# Altium PCB EE464_PCB.PcbDoc
Units mm, origin at the board's own origin, x right, y up, seen from the top; angles counter-clockwise.
Board outline 54.9 x 33.3 mm, 2 copper layers (Top Layer, Bottom Layer); 39 components, 23 nets, 98 pads, 36 vias.
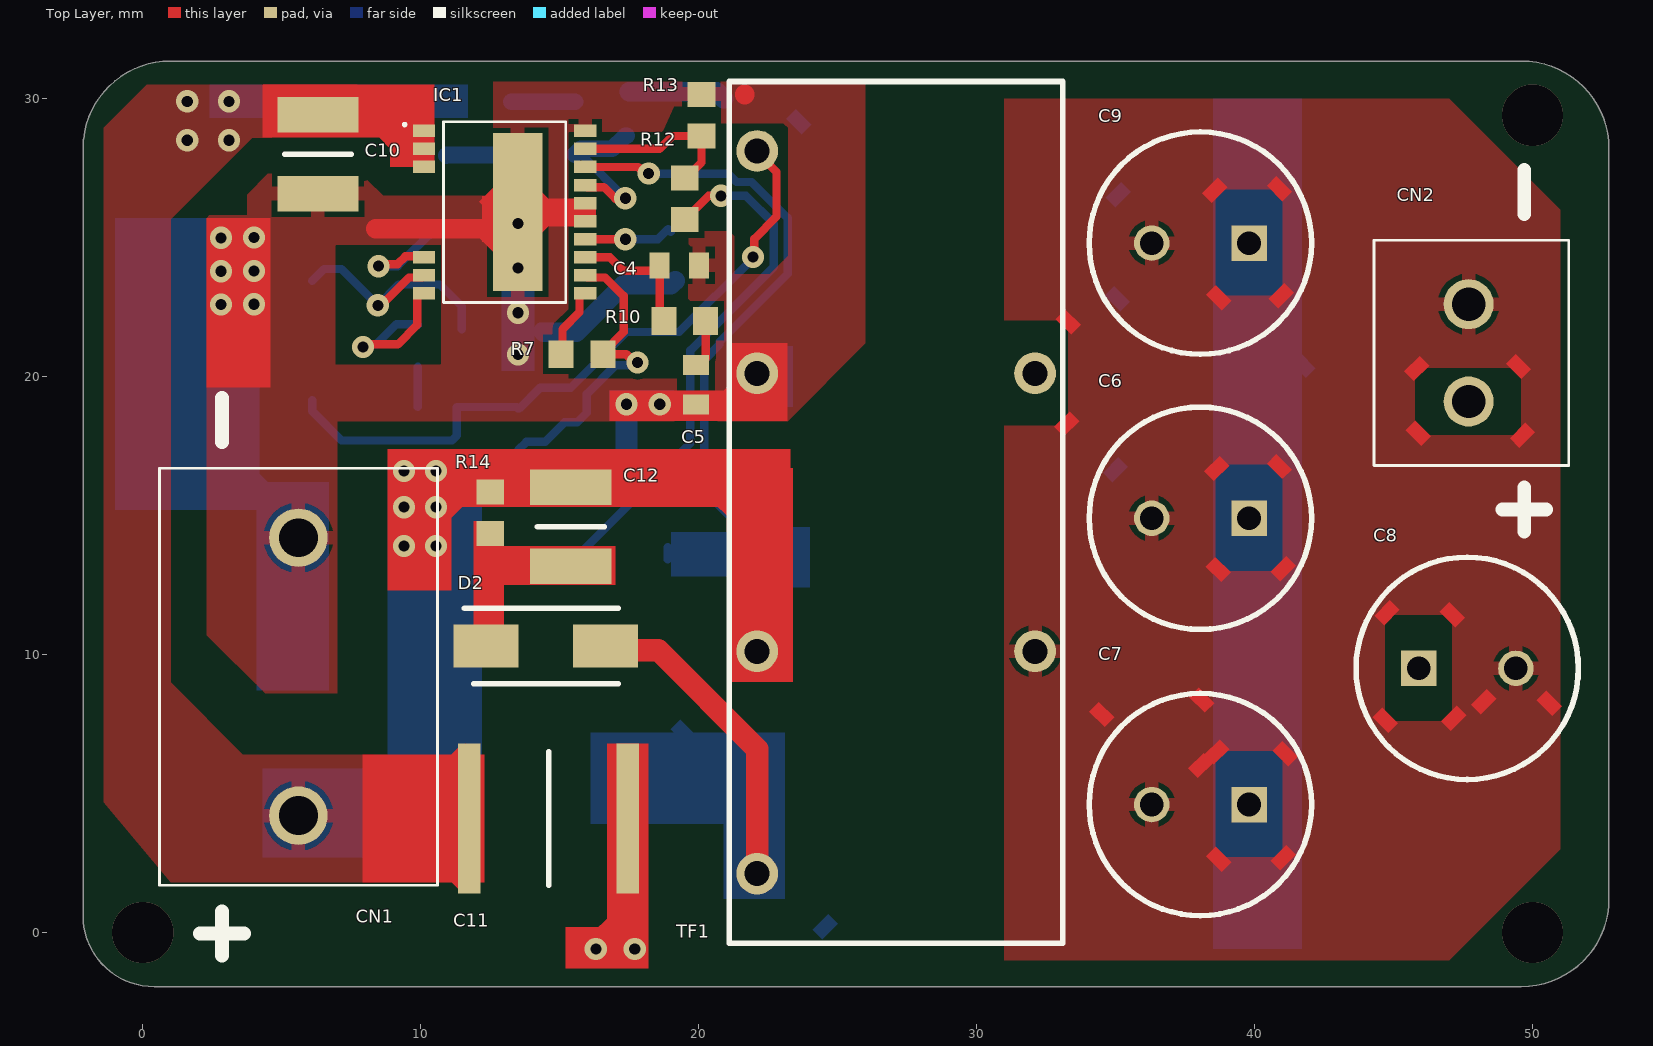
[diagram p0: Top Layer view]
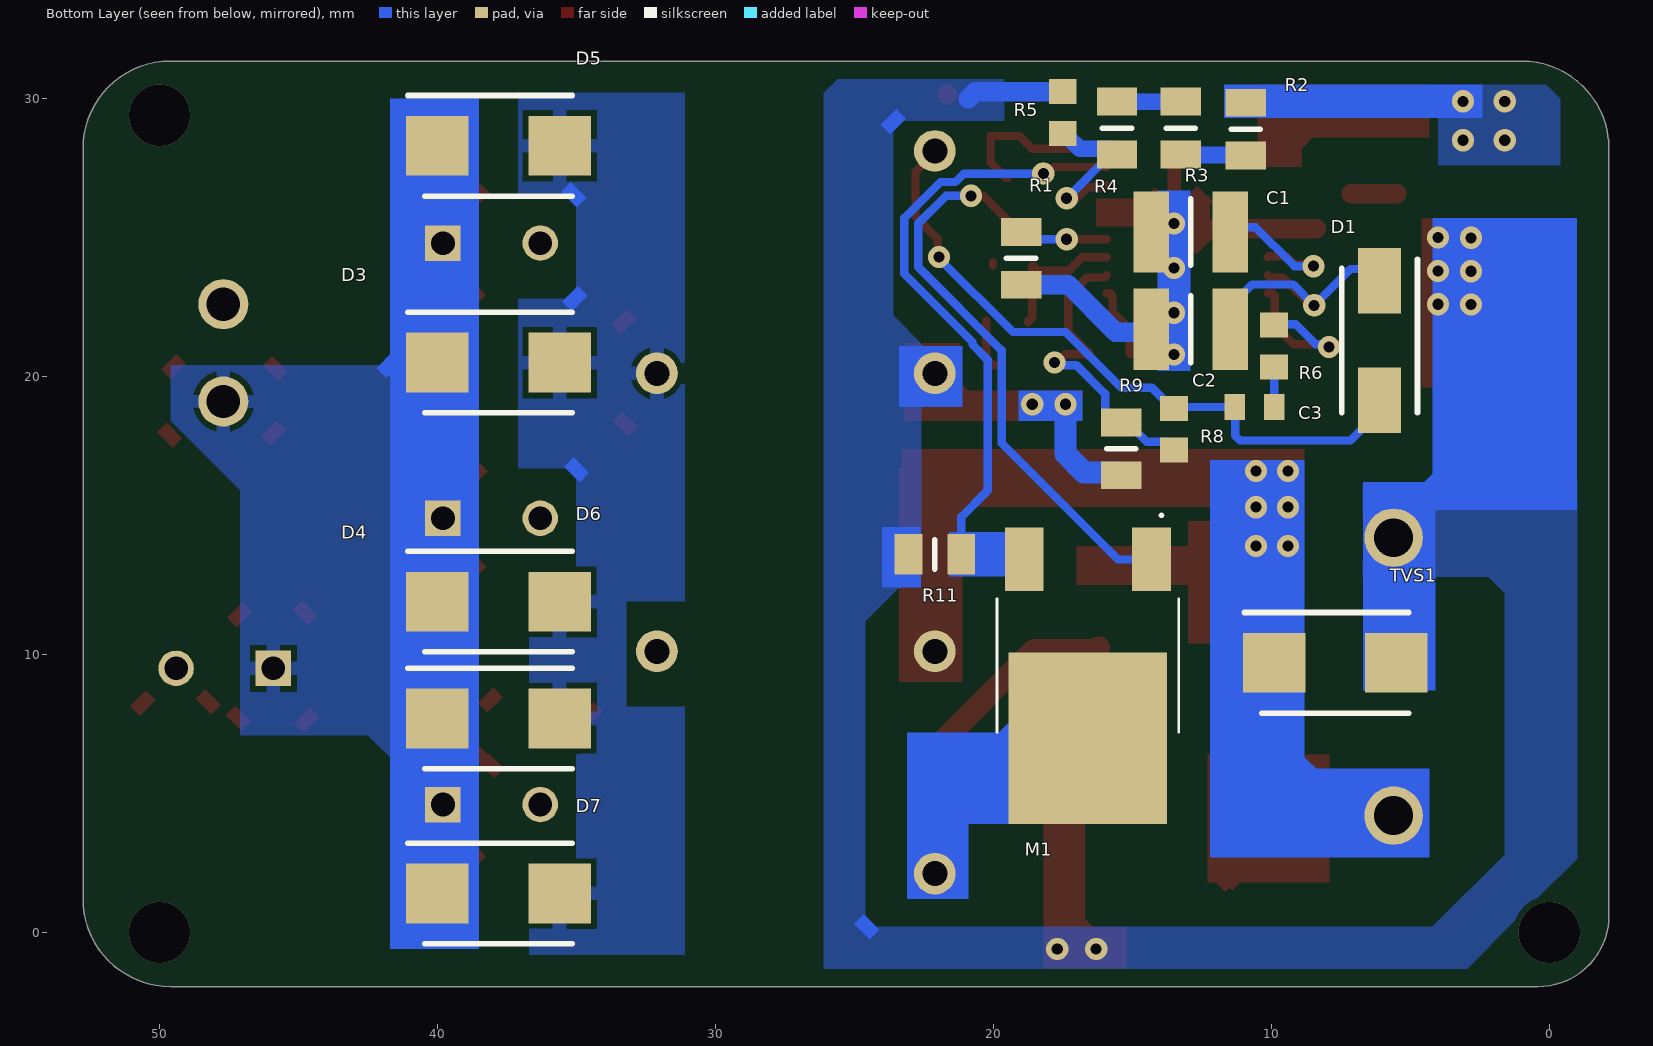
[diagram p1: Bottom Layer view, seen from below]
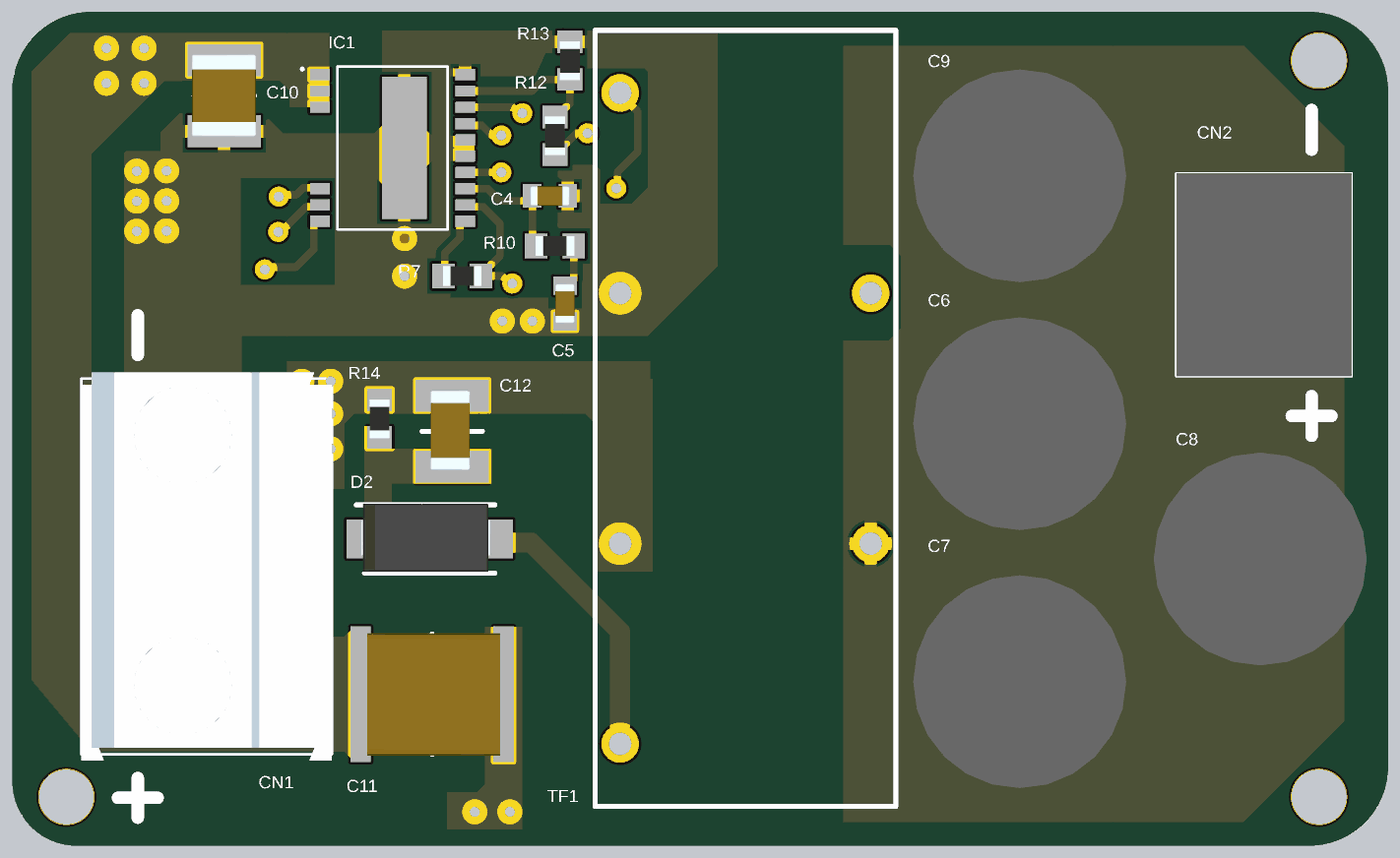
[diagram p2: 3D render of the assembled board from above, using the file's embedded part models]
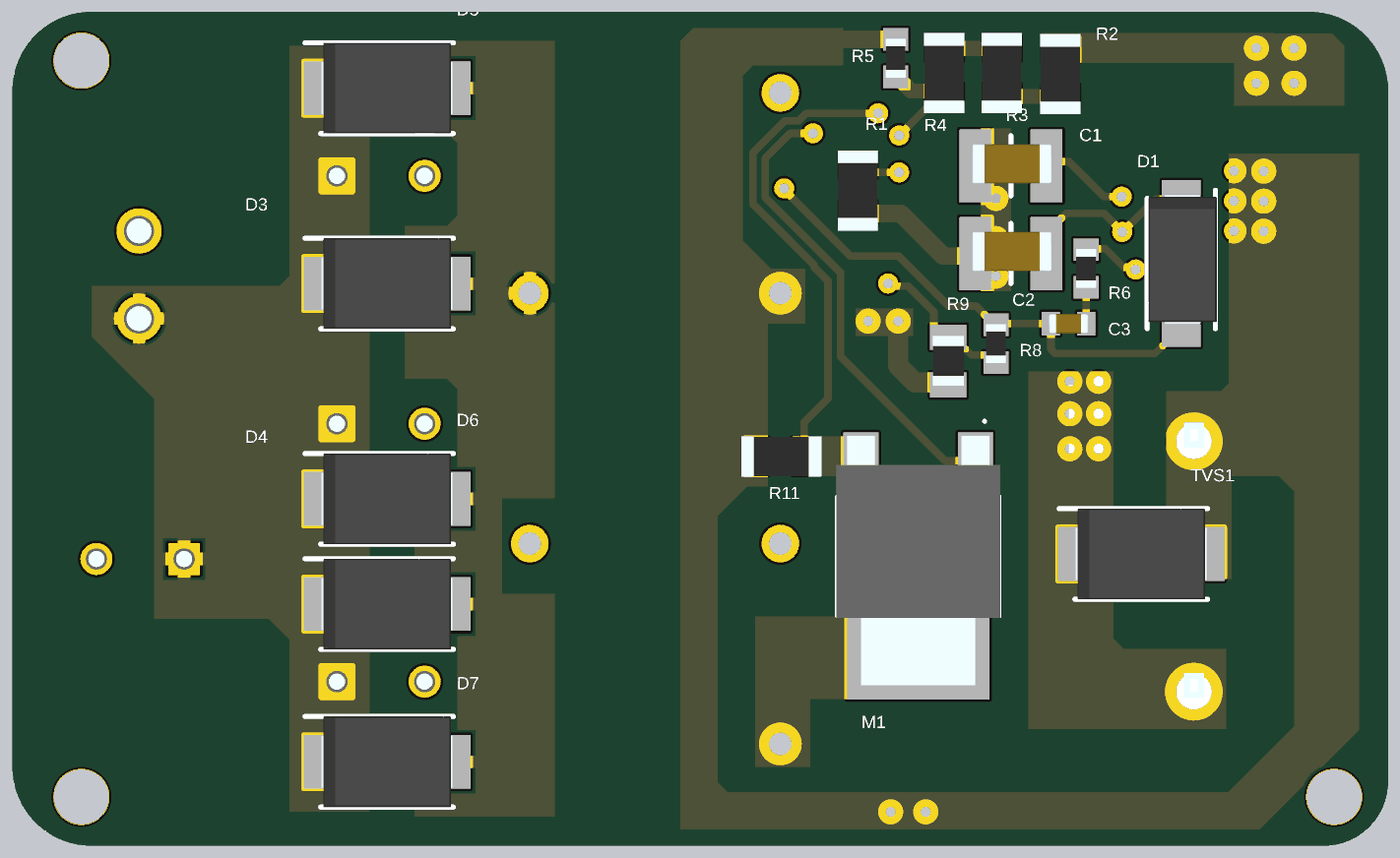
[diagram p3: 3D render of the assembled board from below, using the file's embedded part models]

## Layer stack, top to bottom
Top Solder: solder mask 0.0102, Solder Resist, Dk 3.5
Top Layer: signal copper 0.0356
Dielectric 1: dielectric 0.32, FR-4, Dk 4.8
Bottom Layer: signal copper 0.0356
Bottom Solder: solder mask 0.0102, Solder Resist, Dk 3.5

## Board outline
-2.15,0.61 -2.15,28.473 cw(c-2,28.473) -2.132,28.545 cw(c1,28.205) 1,31.355 cw(c1,31.205) 1.001,31.355 19.6,31.355 49.6,31.355 cw(c49.6,28.205) 52.75,28.205 52.75,1.205 cw(c49.6,1.205) 49.6,-1.946 3.6,-1.946 0.405,-1.946 cw(c0.405,0.61)

## Design rules (kind name [scope] priority, off if disabled: settings)
Clearance [All] p1: gap=0.2 ignorepadtopadclearanceinfootprint=FALSE except(0: Arc-Hole Track-Hole SMDPad-Hole THPad-Hole Via-Hole Fill-Hole Poly-Hole Region-Hole Text-Hole)
HoleToHoleClearance [All] p1: gap=0.4 allowstackedmicrovias=TRUE
MinimumSolderMaskSliver [All] p1: minsoldermaskwidth=0.1
PolygonConnect [All] p1: thpad.connectstyle=Relief thpad.reliefconductorwidth=0.5 thpad.reliefentries=4 thpad.polygonreliefangle="90 Angle" thpad.airgapwidth=0.2 smdpad.connectstyle=Relief smdpad.reliefconductorwidth=0.5 smdpad.reliefentries=4 smdpad.polygonreliefangle="90 Angle" smdpad.airgapwidth=0.2 via.connectstyle=Direct via.reliefconductorwidth=0.254 via.reliefentries=4 via.polygonreliefangle="90 Angle" via.airgapwidth=0.254
RoutingVias [All] p1: holewidth=0.4 width=0.8 viastyle="Through Hole" minholewidth=0.2 minwidth=0.4 maxholewidth=0.8 maxwidth=1.6
SilkToSilkClearance [All] p1: silktosilkclearance=0.1
SilkToSolderMaskClearance [IsPad] p1: minsilkscreentomaskgap=0.1 clearancetoexposedcopper=TRUE
SolderMaskExpansion [All] p1: expansion=0.102 istentingtop=FALSE
Width [All] p1: maxlimit=1.5 minlimit=0.2 preferedwidth=0.5
26 further rules are at their usual default settings.

## Classes and differential pairs
component class EE464_SCH: C1 C2 C3 C4 C5 C6 C7 C9 C10 C11 C12 CN1 CN2 D1 D2 D3 D4 D5 D6 D7 IC1 M1 R1 R2 R3 R4 R5 R6 R7 R8 R9 R10 R11 R12 R13 R14 TVS1

## Components (designator, comment, footprint, x,y, rotation, side; value= is the part's Value field where it differs from the comment)
C1 "CAP 4.7uF 1206" CAP_1206 12.9,25.205 r180 bottom
C2 "CAP 4.7uF 1206" CAP_1206 12.9,21.705 r180 bottom
C3 "CAP 47pF 0603" 0603_CAP 10.6,18.905 r0 bottom
C4 "CAP 47pF 0603" 0603_CAP 19.3,24.005 r180 top
C5 "CAP 100nF" 0603_CAP 19.9,19.705 r90 top
C6 "A750KK337M1CAAE014" CAPPRD350W65D800H900 39.8,14.905 r180 top
C7 "A750KK337M1CAAE014" CAPPRD350W65D800H900 39.8,4.605 r180 top
C8 "A750KK337M1CAAE014" CAPPRD350W65D800H900 45.9,9.505 r0 top
C9 "A750KK337M1CAAE014" CAPPRD350W65D800H900 39.8,24.805 r180 top
C10 "CAP 0.1uF 500V 1210" CAP_1210 6.3,28.005 r90 top
C11 "CAP 1uF 500v" CAP_2210 14.6,4.105 r180 top
C12 "CAP, 0.1u, 200V, 1206" CAP_1206 15.4,14.605 r90 top
CN1 "CONN_KLE_2_HV" 2828582 5.6,4.205 r90 top
CN2 "CONN_KLE_2_LV" 691103110002 47.7,19.105 r90 top
D1 "DI SK115" DIOM5227X270N 6.1,21.305 r270 bottom
D2 "DI S1J-E3/61T 600V 1A SMA" DIOM5227X270N 14.5,10.305 r0 top
D3 "DI CDBB3150-HF 150V 3A SMB" S2GTR 37.8,20.505 r180 bottom
D4 "DI CDBB3150-HF 150V 3A SMB" S2GTR 37.8,7.705 r180 bottom
D5 "DI CDBB3150-HF 150V 3A SMB" S2GTR 37.8,28.305 r180 bottom
D6 "DI CDBB3150-HF 150V 3A SMB" S2GTR 37.8,11.905 r180 bottom
D7 "DI CDBB3150-HF 150V 3A SMB" S2GTR 37.8,1.405 r180 bottom
IC1 "IC LT8316EFEPB" LT8316IFEPBF 12.601,25.919 r270 top
M1 "MOS, N-CH, IPD50R500CEAUMA1" FDD5N50NZ 16.6,10.205 r0 bottom
R1 "RES, 50K, 1206" RES_1206 19,24.255 r270 bottom
R2 "RES, 499K, 1206" RES_1206 10.915,28.907 r270 bottom
R3 "RES, 499K, 1206" RES_1206 13.252,28.944 r270 bottom
R4 "RES, 499K, 1206" RES_1206 15.552,28.944 r270 bottom
R5 "RES, 9.2K, 0603" 0603_RES 17.5,29.505 r90 bottom
R6 "RES, 10K, 0603" 0603_RES 9.9,21.105 r90 bottom
R7 "RES, 121K, 0603" 0603_RES 15.8,20.805 r180 top
R8 "RES, 47K, 0603" 0603_RES 13.5,18.105 r270 bottom
R9 "RES, 5K, 0805" RES_0805 15.4,17.405 r90 bottom
R10 "RES, 15K, 0603" 0603_RES 19.5,22.005 r0 top
R11 "RES, 0.01,1206" RES_1206 22.1,13.605 r180 bottom
R12 "RES, 20, 0603" 0603_RES 19.5,26.405 r270 top
R13 "RES, 10K, 0603" 0603_RES 20.1,29.405 r270 top
R14 "RES, 5K6, 0603" 0603_RES 12.5,15.105 r90 top
TF1 "TF 4:1" tf_mount 31.103,0.119 r0 top
TVS1 "TVS DI SMBJE400CA 400V SMB" S2GTR 7.7,9.705 r180 bottom

## Footprints (in the part's own frame and the unit in brackets; to place one, negate y for a bottom-side part, rotate by r counter-clockwise, add the part's x,y. Pads: shape width x height; smd on the part's side, far side on the other; paste and mask are expansions set on the pad)
0603_CAP [mm]
  rect 0.73x0.94 smd: 1(-0.71,0) 2(0.71,0)
  body extent -0.8,-0.4 0.8,0.4, height 0.9
0603_RES [mm]
  rect 0.9x1 smd: 1(-0.75,0) 2(0.75,0)
  body extent -0.77,-0.4 0.78,0.4, height 0.55
2828582 [mm]
  round 2.1 hole 1.4: 1(0,0) 2(10,0)
  silkscreen extent -2.5,-5 12.5,5, body extent -2.75,-5 12.75,5, height 19
691103110002 [mm]
  round 1.8 hole 1.2: 1(0,0) 2(3.5,0)
  silkscreen extent -2.3,-3.6 5.8,3.4, body extent -2.3,-3.6 5.8,3.4, height 8.65
CAP_1206 [mm]
  rect 1.28x2.92 smd: 1(-1.42,0) 2(1.42,0)
  silkscreen extent 0,-1.2 0,1.2, body extent -1.56,-0.72 1.64,0.88, height 0.88
CAP_1210 [mm]
  rect 1.28x2.92 smd: 1(-1.42,0) 2(1.42,0)
  silkscreen extent 0,-1.2 0,1.2, body extent -1.64,-1.29 1.66,1.31, height 0.98
CAP_2210 [mm]
  rect 0.81x5.41 smd: 1(-2.85,0) 2(2.85,0)
  silkscreen extent 0,-2.4 0,2.4, body extent -2.71,-2.44 2.59,2.46, height 2.77
CAPPRD350W65D800H900 [mm]
  rect 1.275x1.275 / inner round 1.275 / far side rect 1.275x1.275 hole 0.85: 1(0,0)
  round 1.275 hole 0.85: 2(3.5,0)
  silkscreen extent -2.25,-4 5.75,4, body extent -2.5,-4.25 6,4.25, height 9
DIOM5227X270N [mm]
  rect 2.35x1.55 smd: 1(2.15,0) 2(-2.15,0)
  silkscreen extent -2.93,-1.36 2.6,1.36, body extent -2.76,-1.31 2.44,1.41, height 2.7
FDD5N50NZ [mil]
  rect 55x90 smd: 1(-90,-126.69) 3(90,-126.69)
  rect 224.02x243.31 smd: 2(0,126.65)
  silkscreen extent -129,-191 129,118, body extent -129,-166 129,226, height 98
LT8316IFEPBF [mm]
  rect 0.45x0.8 smd: 1(-2.925,-2.48) 2(-2.275,-2.48) 3(-1.625,-2.48) 8(1.625,-2.48) 9(2.275,-2.48) 10(2.925,-2.48) 11(2.925,3.32) 12(2.275,3.32) 13(1.625,3.32) 14(0.975,3.32) 15(0.325,3.32) 16(-0.325,3.32) 17(-0.975,3.32) 18(-1.625,3.32) 19(-2.275,3.32) 20(-2.925,3.32)
  rect 5.68x1.78 smd: 21(0,0.89)
  silkscreen extent -3.25,-3.23 3.25,2.62, body extent -3.3,-1.6 3.2,2.6, height 1.2
RES_0805 [mm]
  rect 1x1.45 smd: 1(-0.95,0) 2(0.95,0)
  silkscreen extent 0,-0.53 0,0.53, body extent -0.99,-0.62 1.01,0.63, height 0.6
RES_1206 [mm]
  rect 1x1.45 smd: 1(-0.95,0) 2(0.95,0)
  silkscreen extent 0,-0.53 0,0.53, body extent -1.56,-0.81 1.64,0.79, height 0.75
S2GTR [mm]
  rect 2.25x2.15 smd: 1(2.2,0) 2(-2.2,0)
  silkscreen extent -3.27,-1.81 2.65,1.81, body extent -2.65,-1.81 2.65,1.81, height 2.5
tf_mount [mm]
  round 1.5 hole 0.9: 1(-9,10) 2(-9,2) 3(1,20) 4(1,10) 5(-9,20) 6(-9,28)
  silkscreen extent -10,-0.5 2,30.5, body extent -8,0 0,30, height 20.3

## Part data
C6 C7 C8 C9: library part "CAP 330uF AL. POLY.", "CAP,330uF,AL.POLY.,16V, A750KK337M1CAAE014", Parameter 1=330uF
D1: "DI, SK115, 150V, 1A, SMA"
IC1: "IC, PMIC, Flyback Controller, 16-600V, 100W"
C1 C2: Parameter 1=4.7uF
C3 C4: Parameter 1=47pF
C5: Parameter 1=100nF
C10: Parameter 1=0.1uF, Parameter 2=500V
C11: Parameter 1=1uF, Parameter 2=500V
R1: Parameter 1=50k
R2 R3 R4: Parameter 1=499k
R5: Parameter 1=9.2k
R6 R13: Parameter 1=10K
R7: Parameter 1=121k
R8: Parameter 1=47k
R9: Parameter 1=5k
R11: Parameter 1=0.01
R12: Parameter 1=20
R14: Parameter 1=5K6
TF1: Parameter 1=P, Parameter 2=S, Parameter 3=T

## Via types
v1: diameter 0.8, hole 0.4, Top Layer to Bottom Layer, 33 vias
v2: diameter 2.2, hole 2.2, Top Layer to Bottom Layer, 3 vias

## Nets (pads, with @x,y where several pads share a name; then routed paths per layer and width w, separated by ;. In a path a pad name is that pad's centre, name@x,y a point inside that pad or via, vN(x,y) a via of type N, cw(c..) or ccw(c..) an arc to the next point about the centre after c; other vN are vias at no path point)
12V: C6.1 C7.1 C8.1 C9.1 CN2.1 D3.2 D4.2 D5.2 D6.2 D7.2
Curr_Sense: IC1.18 M1.3 R11.2 | length 22.2
  Top Layer w0.3: IC1.18 17.826,27.544 18.065,27.305 v1(18.2,27.305)
  Bottom Layer w0.3: v1(18.2,27.305) 21.061,27.305 21.361,27.005 21.907,27.005 23.2,25.712 23.2,23.7 20.75,21.25 20.75,21.155 20.2,20.605 20.2,15.905 21.15,14.955 R11.2 ; M1.3 M1.3@18.886,13.867
GND: C1.1 C2.1 C4.1 C5.1 C10.1 C11.1 CN1.2 IC1.15 IC1.16 IC1.20 IC1.21 R1.2 R5.2 R9.1 R11.1 R13.1 TF1.5 TVS1.1 | length 24.3
  Top Layer w0.3: C4.1 C4.1@20.01,24.11
  Top Layer w0.5: IC1.21 IC1.21@13.491,27.869
  Top Layer w0.7: v1@3.8,25.005 3.8,25.105 4.05,25.355 4.25,25.355 ; C10.1@5.48,26.585 C10.1 C10.1@7.12,26.585 ; 8.38,25.325 13.491,25.325 14.071,25.905 14.8,25.905 ; 21.65,30.155 21.663,30.142
  Bottom Layer w0.5: C2.1 C2.1@14.42,21.605
  Bottom Layer w0.7: C2.1@14.42,21.605 15.6,21.605 17.3,23.305 R1.2 R1.2@19.15,23.455 ; R5.2 20.65,30.255 20.9,30.005
  Bottom Layer w0.8: R9.1 15.5,16.555 16.731,16.555 17.4,17.223 v1(17.4,19.005)
  other v1: 16.3,-0.595 17.7,-0.595 18.6,19.005 13.5,20.8 13.5,22.3 2.81,22.592 4,22.605 2.81,23.792 4,23.805 13.5,23.905 2.81,24.992 4,25.005 13.5,25.505
ISO_GND: C6.2 C7.2 C8.2 C9.2 CN2.2 TF1.4
NetC1_2: C1.2 IC1.8 | length 5.4
  Top Layer w0.3: v1(8.48,23.975) 8.552,24.047 9.168,24.047 9.447,24.325 10.089,24.325 IC1.8
  Bottom Layer w0.3: v1(8.48,23.975) 9.17,23.975 10.566,25.37 11.314,25.37 C1.2
NetC2_2: C2.2 D1.2 IC1.9 | length 9.7
  Top Layer w0.3: v1(8.457,22.565) 8.572,22.565 9.576,23.569 10.046,23.569 IC1.9
  Bottom Layer w0.3: D1.2 6.517,23.872 7.149,23.872 v1(8.457,22.565) 9.207,23.315 10.69,23.315 11.48,22.525 C2.2
NetC3_1: C3.1 R6.1 | length 1.5
  Bottom Layer w0.3: C3.1 9.89,20.345 R6.1
NetC3_2: C3.2 D1.1 R8.1 TF1.6 | length 24.5
  Top Layer w0.3: v1(21.95,24.305) 22,24.355 22,24.955 22.8,25.755 22.8,27.367 22.103,28.064 TF1.6
  Bottom Layer w0.3: D1.1 6.1,18.755 7.15,17.705 11.124,17.705 11.3,17.88 11.3,18.895 C3.2 13.45,18.905 R8.1 13.55,18.855 14.3,19.605 15.4,19.605 17.4,21.605 19.3,21.605 21.95,24.255 v1(21.95,24.305)
NetC4_2: C4.2 IC1.13 R10.1 | length 5.1
  Top Layer w0.3: IC1.13 16.811,24.294 17.3,23.805 18.39,23.805 18.579,23.994 18.6,23.973 18.6,22.105 18.75,21.955 R10.1
NetC5_2: C5.2 R10.2 | length 1.8
  Top Layer w0.3: C5.2 20.005,20.415 20.25,20.66 R10.2
NetC12_1: C12.1 D2.2 R14.1
NetD2_1: D2.1 M1.2 TF1.2 | length 11.9
  Top Layer w0.8: D2.1@16.206,10.248 16.299,10.156 18.549,10.156 22.103,6.602 TF1.2
NetD3_1: D3.1 D4.1 D5.1 D6.1 D7.1 TF1.3
NetM1_1: M1.1 R12.2 | length 20.2
  Top Layer w0.3: R12.2 19.501,25.653 20.352,26.505 v1(20.8,26.505)
  Bottom Layer w0.3: M1.1 15.518,13.423 19.7,17.605 19.7,20.944 22.7,23.944 22.7,25.505 21.7,26.505 v1(20.8,26.505)
NetR1_1: IC1.14 R1.1 | length 3.3
  Top Layer w0.3: IC1.14 v1(17.361,24.944)
  Bottom Layer w0.3: v1(17.361,24.944) 18.539,24.944 18.9,25.305 R1.1
NetR2_2: R2.2 R3.2 | length 2.4
  Bottom Layer w0.6: R2.2 10.934,27.975 13.234,27.975 R3.2
NetR3_1: R3.1 R4.1 | length 2.3
  Bottom Layer w0.6: R3.1 R4.1
NetR4_2: IC1.17 R4.2 R5.1 | length 6.4
  Top Layer w0.3: IC1.17 15.996,26.819 16.586,26.819 17,26.405 17.347,26.405 v1(17.361,26.418)
  Bottom Layer w0.3: R4.2 15.777,27.994 17.353,26.418 v1(17.361,26.418) ; R5.1@17.409,28.663 R5.1
  Bottom Layer w0.6: R4.2 15.752,28.194 16.889,28.194 17.359,28.663 R5.1@17.409,28.663
NetR6_2: IC1.10 R6.2 | length 6
  Top Layer w0.3: v1(7.92,21.065) 8.016,21.16 9.176,21.16 9.871,21.856 9.871,22.919 9.946,22.994 IC1.10
  Bottom Layer w0.3: v1(7.92,21.065) 8.016,21.16 8.396,21.16 9.126,21.89 9.864,21.89 R6.2
NetR7_1: IC1.12 R7.1 R8.2 R9.2 | length 11.5
  Top Layer w0.3: IC1.12 15.996,23.569 16.636,23.569 17.3,22.905 17.3,21.605 16.55,20.855 R7.1 17.393,20.805 17.693,20.505 v1(17.8,20.505)
  Bottom Layer w0.3: R8.2 13.8,17.655 14.475,17.655 15.175,18.355 15.625,18.355 15.975,18.705 15.975,19.38 17.004,20.409 17.704,20.409 v1(17.8,20.505)
NetR7_2: IC1.11 R7.2 | length 2.6
  Top Layer w0.3: R7.2 15.1,20.855 15.1,21.705 15.714,22.319 15.714,22.919 15.789,22.994 IC1.11
NetR12_1: IC1.19 R12.1 R13.2 | length 6.1
  Top Layer w0.3: IC1.19 18.589,28.194 19.05,28.655 R13.2 20.1,27.705 19.55,27.155 R12.1
Vin: C10.2 C11.2 C12.2 CN1.1 IC1.1 IC1.2 IC1.3 R2.1 R14.2 TF1.1 TVS1.2
  other v1: 9.4,13.905 10.55,13.905 9.4,15.305 10.55,15.305 9.4,16.6 10.55,16.6 1.6,28.505 3.1,28.505 1.6,29.905 3.1,29.905
copper on no net:
  other v2: 0,0 50,0 50,29.405

## Polygon pours and split planes (outlines as drawn)
ISO_GND on Top Layer "ISO_GND_L01_P009" (solid, remove dead copper, pour order 9): 31,30 47,30 51,26 51,3 47,-1 31,-1
GND on Top Layer "GND_L01_P010" (solid, remove dead copper, pour order 10): 12.6,30.6 26,30.6 26,21.205 23.195,18.4 7,18.4 7,8.6 4.4,8.6 2.3,10.7 2.3,25.705 2.398,25.802 3.75,25.802 3.75,26.15 4.9,27.3 7.85,27.3 8.65,26.5 12.295,26.5 12.661,26.866 12.6,26.926
GND on Top Layer "GND_L01_P008" (solid, pour order 8): 12.9,26.5 12.95,26.45 12.95,24.85 3.955,24.85 3.75,25.055 3.75,26.55 4.5,27.3 7.85,27.3 8.65,26.5
Vin on Top Layer "VIN_L01_P000" (solid, pour order 0): 8.3,6.405 8.3,1.805 1,1.805 -1.4,4.685 -1.4,28.955 0.15,30.505 7.8,30.505 7.8,28.594 3.933,28.594 1,25.661 1,9.005 3.6,6.405
GND on Bottom Layer "GND_L02_P002" (solid, remove dead copper, pour order 2): 6.6,16.205 6.7,16.105 6.7,12.805 2.2,12.805 1.6,12.205 1.6,2.805 4.2,0.205 24.6,0.205 24.6,11.205 22.6,13.205 22.6,19.205 21.6,20.205 23.6,22.205 23.6,29.205 19.6,29.205 19.6,30.705 25.6,30.705 26.1,30.205 26.1,-1.295 2.95,-1.295 -1,2.654 -1,16.205
NetD3_1 on Bottom Layer "NETD3_1_L02_P006" (solid, pour order 6): 31.1,30.205 37.1,30.205 37.1,-0.795 31.1,-0.795
12V on Bottom Layer "12V_L02_P003" (solid, pour order 3): 49.6,20.405 40.2,20.405 40.2,6.705 40.6,6.305 41.7,6.305 42.5,7.105 47.1,7.105 47.1,15.905 49.6,18.405
Vin on Bottom Layer "VIN_L02_P007" (solid, pour order 7): -0.4,30 0.1,30.5 4,30.5 4,27.6 -0.4,27.6

## Other copper
Top Layer:
  region net ISO_GND: 46.296,20.4 45.942,20.754 45.377,20.188 45.73,19.834
  region net ISO_GND: 50.096,18 49.742,18.354 49.177,17.788 49.53,17.434
  region net ISO_GND: 49.6,19.904 49.954,20.258 49.388,20.823 49.034,20.47
  region net ISO_GND: 46,17.504 46.354,17.858 45.788,18.423 45.434,18.07
  region net ISO_GND: 46.704,7.6 47.058,7.246 47.623,7.812 47.27,8.166
  region net ISO_GND: 44.304,11.4 44.658,11.046 45.223,11.612 44.87,11.966
  region net ISO_GND: 47,11.896 46.646,11.542 47.212,10.977 47.566,11.33
  region net ISO_GND: 44.6,8.096 44.246,7.742 44.812,7.177 45.166,7.53
  region net ISO_GND: 41,6.896 40.646,6.542 41.212,5.977 41.566,6.33
  region net ISO_GND: 38.6,3.096 38.246,2.742 38.812,2.177 39.166,2.53
  region net ISO_GND: 41.496,2.8 41.142,3.154 40.577,2.588 40.93,2.234
  region net ISO_GND: 39.096,6.6 38.742,6.954 38.177,6.388 38.53,6.034
  region net ISO_GND: 39.096,16.8 38.742,17.154 38.177,16.588 38.53,16.234
  region net ISO_GND: 41.496,13.2 41.142,13.554 40.577,12.988 40.93,12.634
  region net ISO_GND: 38.8,12.6 39.154,12.954 38.588,13.519 38.234,13.166
  region net ISO_GND: 41,16.304 41.354,16.658 40.788,17.223 40.434,16.87
  region net ISO_GND: 41,26.304 41.354,26.658 40.788,27.223 40.434,26.87
  region net ISO_GND: 38.104,26.6 38.458,26.246 39.023,26.812 38.67,27.166
  region net ISO_GND: 40.504,22.8 40.858,22.446 41.423,23.012 41.07,23.366
  region net ISO_GND: 38.6,23.296 38.246,22.942 38.812,22.377 39.166,22.73
  region net ISO_GND: 33.696,18.4 33.342,18.754 32.777,18.188 33.13,17.834
  region net ISO_GND: 33.4,21.504 33.754,21.858 33.188,22.423 32.834,22.07
  region net GND: 12.7,24.395 13.054,24.749 12.488,25.314 12.134,24.961
  region net GND: 12.095,26.3 12.449,25.946 13.014,26.512 12.661,26.866
  rectangle net GND: 12.2,24.85 12.95,26.5
  region net ISO_GND: 50.5,8.705 50.146,8.351 50.712,7.786 51.066,8.139
  region net ISO_GND: 48.7,8.405 48.347,8.758 47.781,8.192 48.135,7.839
  region net ISO_GND: 38.2,7.904 38.554,8.258 37.988,8.823 37.634,8.47
  region net ISO_GND: 37.6,5.905 37.953,5.551 38.519,6.117 38.165,6.47
  region net ISO_GND: 34.4,8.305 34.046,7.951 34.612,7.386 34.966,7.739
  region net GND: 14.2,26.805 13.846,26.451 14.412,25.886 14.766,26.239
  region net GND: 14.8,25.605 14.447,25.958 13.881,25.392 14.235,25.039
  region net GND: 21.7,19.605 21.347,19.958 20.781,19.392 21.135,19.039
  region net Vin: 11.6,15.405 11.247,15.758 10.681,15.192 11.035,14.839
  region net Vin: 21.1,14.904 21.454,15.258 20.888,15.823 20.534,15.47
  region net GND: 16.2,0.005 16.553,-0.349 17.119,0.217 16.765,0.57
  region net Vin: 11.3,1.805 11.653,1.451 12.219,2.017 11.865,2.37
  region net Vin: 11.188,2.424 10.834,2.07 11.4,1.505 11.754,1.858
  region net Vin: 11.6,6.805 11.246,6.451 11.812,5.886 12.166,6.239
  region net Vin: 11.8,6.405 11.446,6.758 10.881,6.192 11.234,5.839
  region net Vin: 9,28.104 9.354,28.458 8.788,29.023 8.434,28.67
  rectangle net GND: 21.2,19.205 23.2,21.205
  rectangle net GND: 16.8,18.405 23.2,19.505
  rectangle net GND: 15.2,-1.295 17.9,0.205
  rectangle net GND: 16.7,-1.295 18.2,6.805
  rectangle net GND: 2.3,19.6 4.6,25.705
  rectangle net GND: 13.3,25.405 16.3,26.405
  rectangle net NetC12_1: 12.6,12.505 17,13.905
  rectangle net NetC12_1: 11.9,10.405 13,14.805
  rectangle net Vin: 21.1,9.005 23.4,16.705
  rectangle net Vin: 16.8,15.305 23.3,17.4
  rectangle net Vin: 7.9,1.805 12.3,6.405
  rectangle net Vin: 8.8,12.305 11.1,16.605
  rectangle net Vin: 8.8,15.305 17,17.4
  rectangle net Vin: 8.9,27.544 10.5,30.205
  rectangle net Vin: 4.3,28.605 10.5,30.505
  pour cut-out: 20.4,29.1 23.05,29.1 23.2,28.95 23.2,24.35 22.55,23.7 21.3,23.7 21.3,24.25 21.3,24.6 21.3,25.047 21.097,25.25 20.176,25.25 20.35,29.2
  pour cut-out: 19.657,28.806 19.6,22.67 20.571,19.843 20.568,19.562 19.23,19.489 19.23,19.939 15.321,19.939 15.321,28.769 15.34,28.787 18.718,28.787 19.129,29.711 20.8,29.711 20.8,29.181
  pour cut-out: 10.721,24.719 10.721,20.471 10.7,20.45 6.95,20.45 6.95,24.7 6.969,24.719
  pour cut-out: 15.6,20.4 16,20.4 16.1,20.3 16.1,20.1 15.705,20.1 15.6,20.205
  pour cut-out: 45.782,20.302 45.782,17.902 49.582,17.902 49.582,20.302
  pour cut-out: 47.097,11.423 44.697,11.423 44.697,7.623 47.097,7.623
  pour cut-out: 40.997,6.523 38.597,6.523 38.597,2.723 40.997,2.723
  pour cut-out: 40.997,16.823 38.597,16.823 38.597,13.023 40.997,13.023
  pour cut-out: 40.997,26.723 38.597,26.723 38.597,22.923 40.997,22.923
  pour cut-out: 33.3,22.037 30.9,22.037 30.9,18.237 33.3,18.237
Bottom Layer:
  region net GND: 24.1,0.105 24.454,-0.249 25.019,0.317 24.666,0.67
  region net NetD2_1: 19.335,7.67 18.981,7.317 19.547,6.751 19.9,7.105
  region net Vin: 9.166,5.97 8.812,6.323 8.246,5.758 8.6,5.404
  region net GND: 4.265,15.739 4.619,16.092 4.053,16.658 3.7,16.305
  region net GND: 23.488,29.624 23.134,29.27 23.7,28.705 24.054,29.058
  region net 12V: 41.635,20.87 41.281,20.517 41.847,19.951 42.2,20.305
  region net NetD3_1: 35.166,22.339 35.519,22.692 34.954,23.258 34.6,22.905
  region net NetD3_1: 34.634,26.439 34.988,26.085 35.554,26.651 35.2,27.005
  region net NetD3_1: 34.534,16.539 34.888,16.185 35.454,16.751 35.1,17.105
  rectangle net 12V: 38.5,-0.595 41.7,30.005
  rectangle net GND: 16.8,18.405 19.1,19.505
  rectangle net GND: 22.6,12.405 24,14.584
  rectangle net GND: 21.1,18.905 23.4,21.105
  rectangle net GND: 12.9,20.205 14.1,26.705
  rectangle net GND: 4.1,8.705 6.7,16.205
  rectangle net GND: -1,15.205 4.2,25.705
  rectangle net Curr_Sense: 19,12.805 21.6,14.405
  rectangle net NetD2_1: 16.1,3.905 23.1,7.205
  rectangle net NetD2_1: 20.9,1.205 23.1,7.205
  rectangle net Vin: 2.4,29.305 11.7,30.505
  rectangle net Vin: 8.8,5.005 12.2,17
  rectangle net Vin: 4.3,2.705 12.2,5.905
  pour cut-out: 36.7,13.205 37.7,13.205 37.7,-0.795 36.7,-0.795
  pour cut-out: 35,26.605 37.4,26.605 37.4,22.804 35,22.804
  pour cut-out: 35,16.704 37.4,16.704 37.4,12.904 35,12.904
  pour cut-out: 30.803,11.918 33.203,11.918 33.203,8.118 30.803,8.118
  pour cut-out: 35,6.405 37.4,6.405 37.4,2.605 35,2.605

## Silkscreen, mask and mechanical layers (free items; w line width, h text height)
Top Overlay:
  lines w0.5: 2.06,-0.035 3.64,-0.035 ; 2.85,-0.825 2.85,0.755 ; 2.85,17.655 2.85,19.234 ; 48.91,15.215 50.49,15.215 ; 49.7,14.425 49.7,16.005 ; 49.7,25.855 49.7,27.434
Mechanical 1:
  lines w0.3: -2,28.205 cw(c1,28.205) 1,31.205 19.6,31.205 47.6,31.205 49.6,31.205 cw(c49.6,28.205) 52.6,28.205 52.6,1.205 cw(c49.6,1.205) 49.6,-1.795 3.6,-1.795 0.405,-1.795 cw(c0.405,0.61) -2,0.61 -2,28.473